# Altium PCB PCB1.PcbDoc
Units mil, origin at the board's own origin, x right, y up, seen from the top; angles counter-clockwise.
Board outline 1574.8 x 1574.8 mil, 4 copper layers (Top Layer, GND, POWER, Bottom Layer); 16 components, 19 nets, 108 pads, 316 vias.
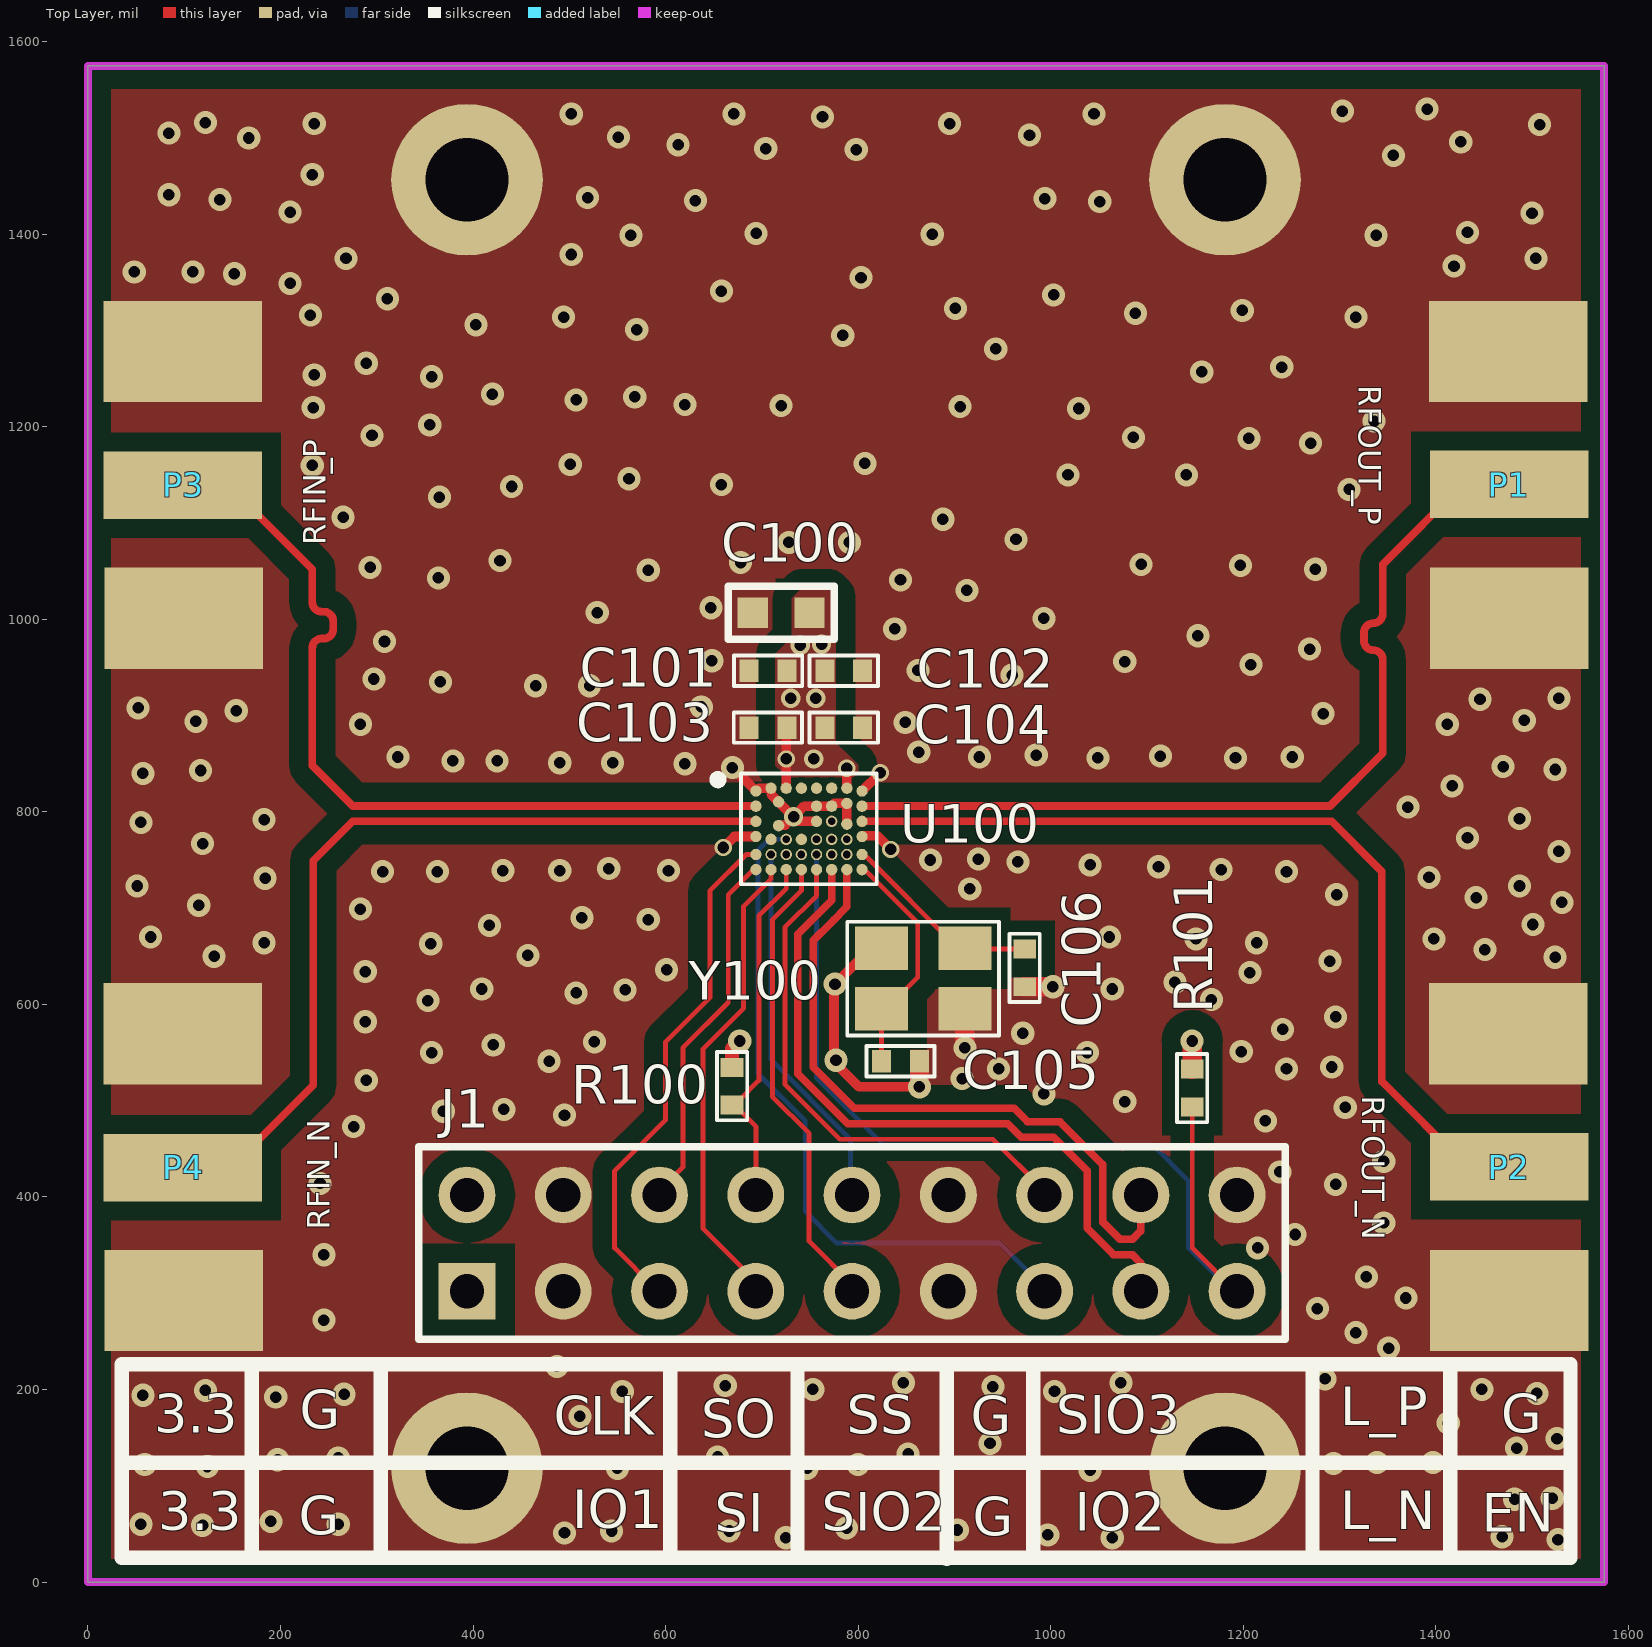
[diagram p0: Top Layer view]
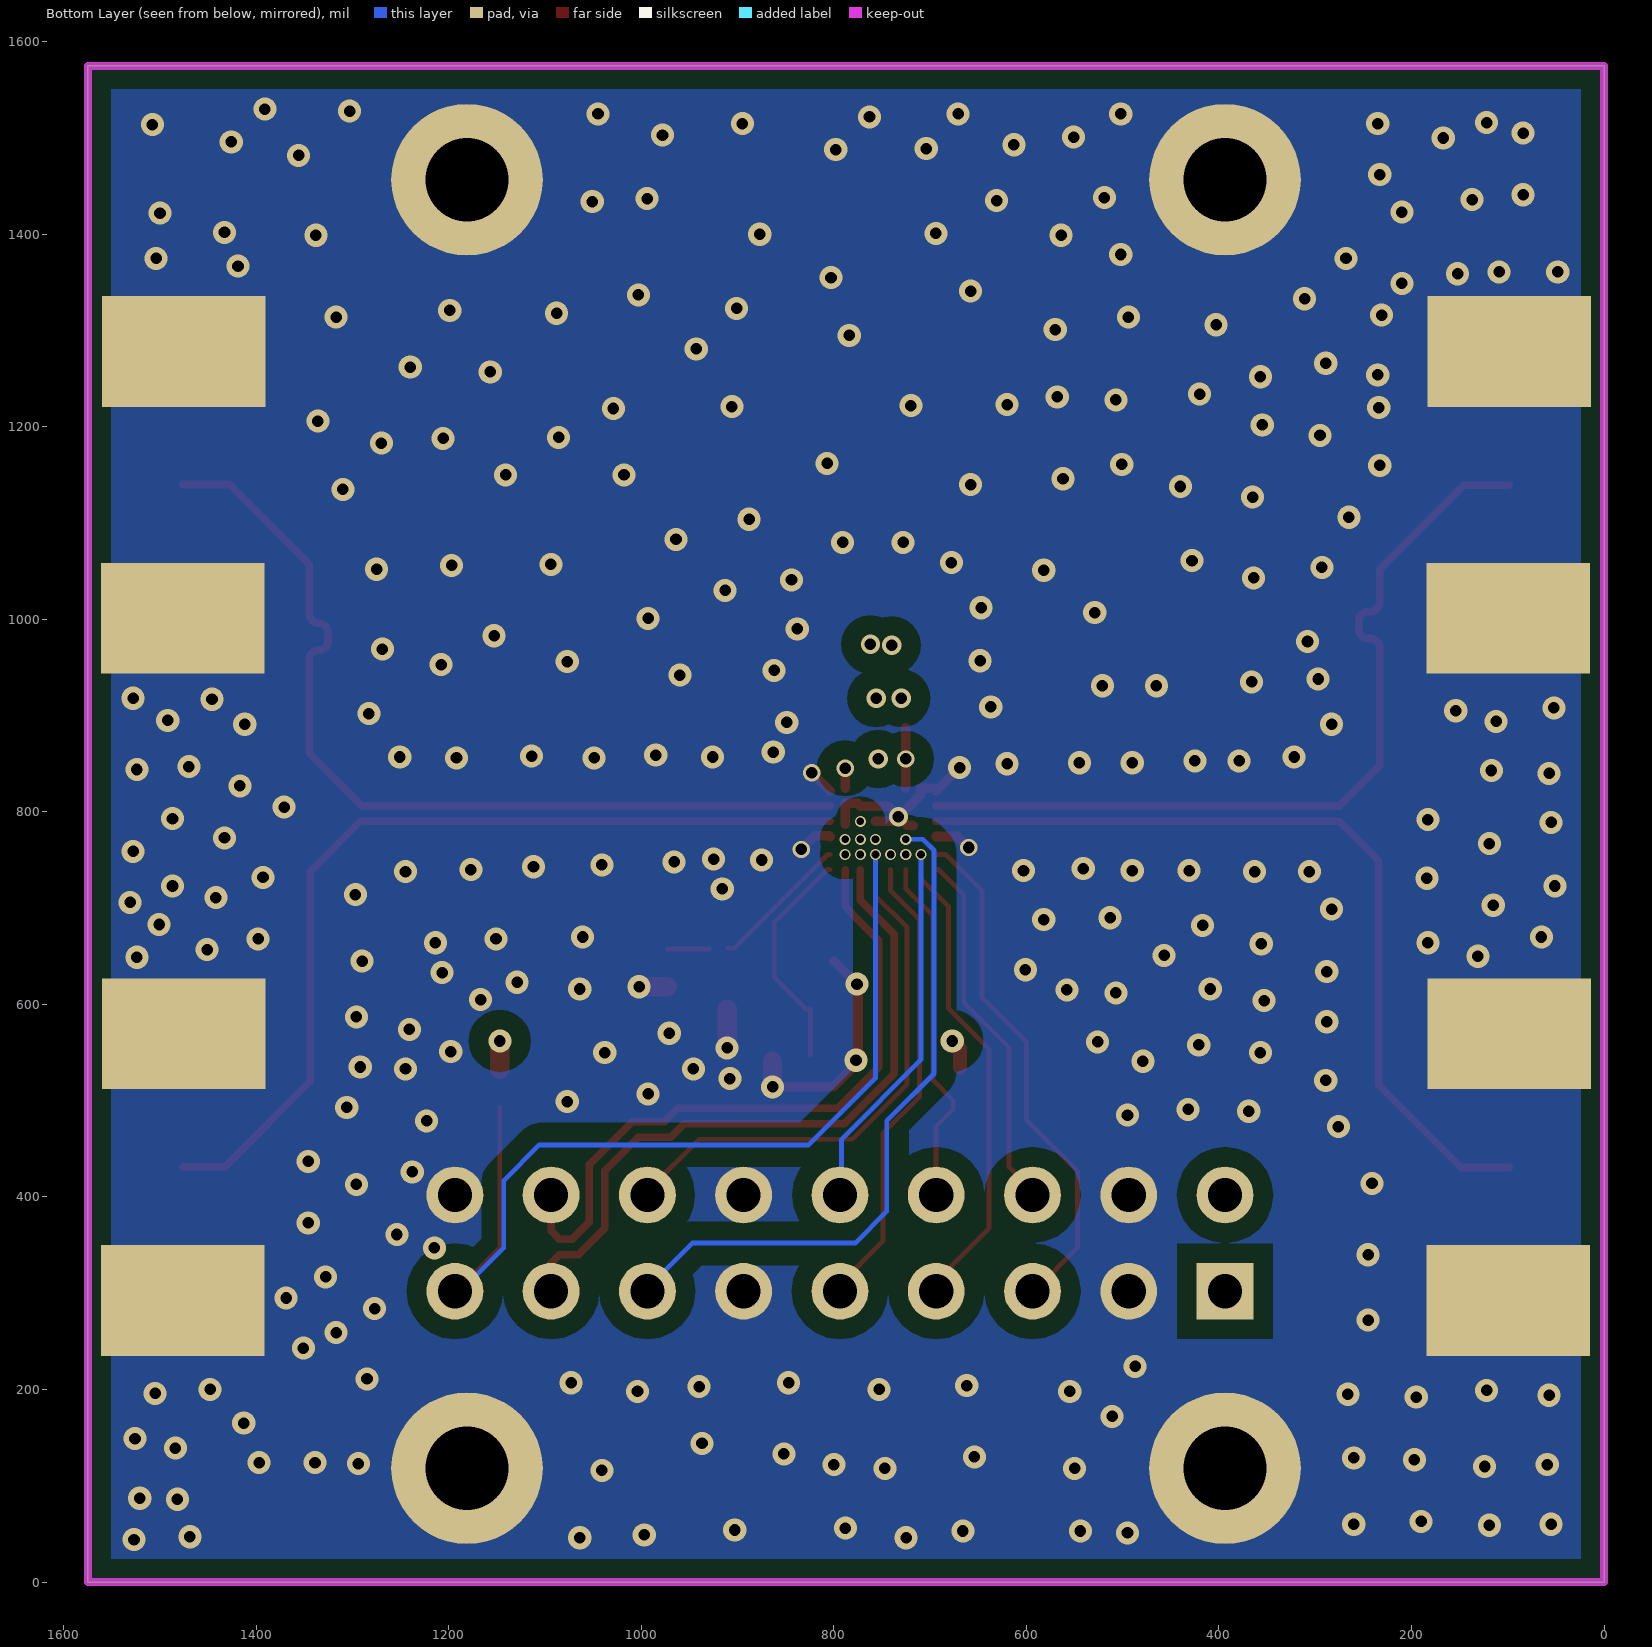
[diagram p1: Bottom Layer view, seen from below]
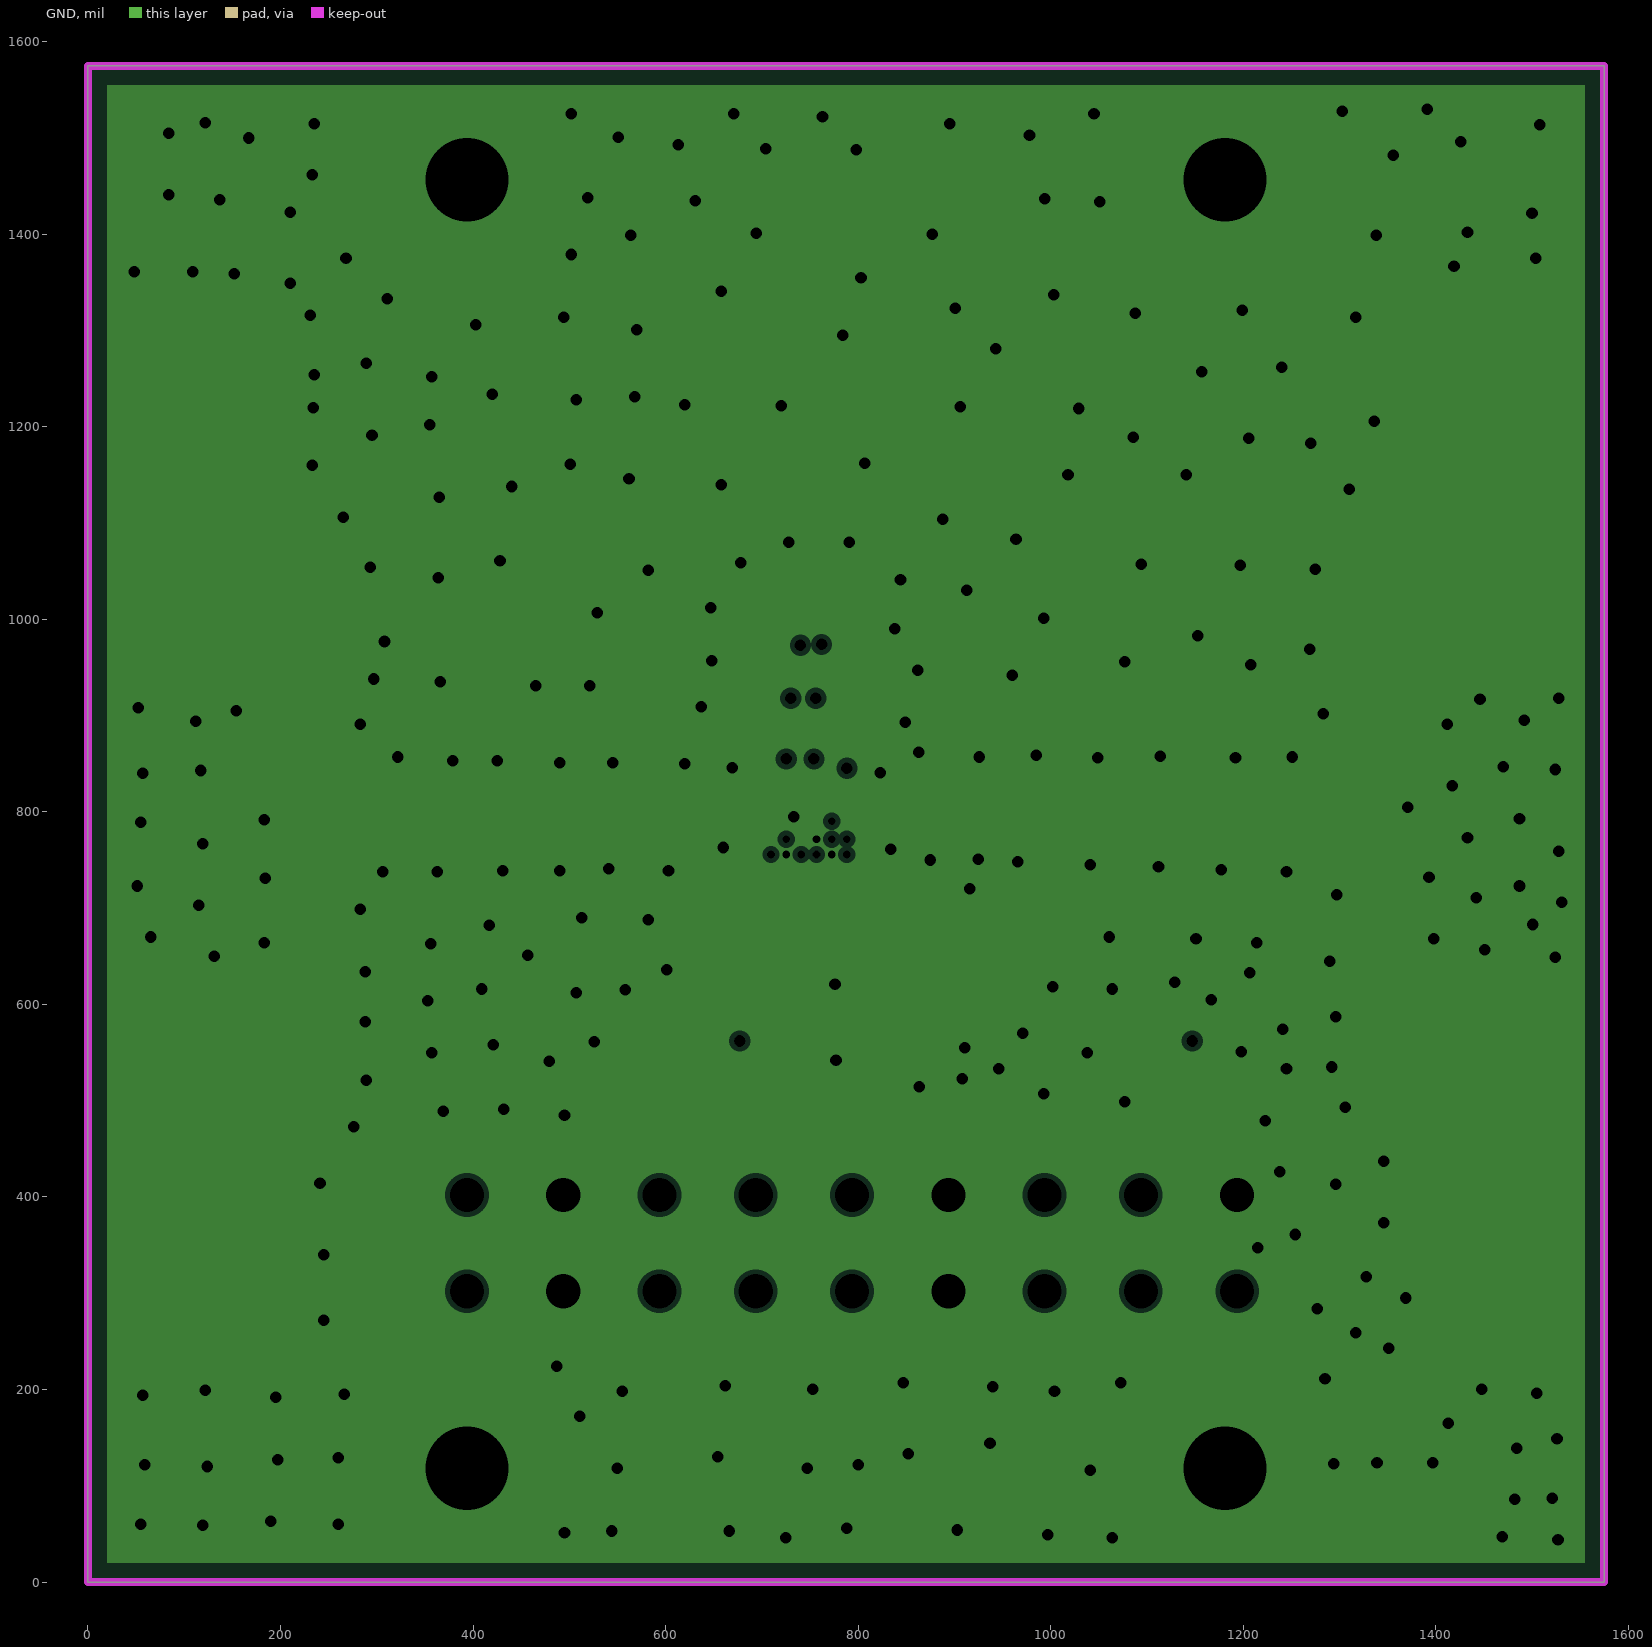
[diagram p2: GND, clearances drawn from the general rule]
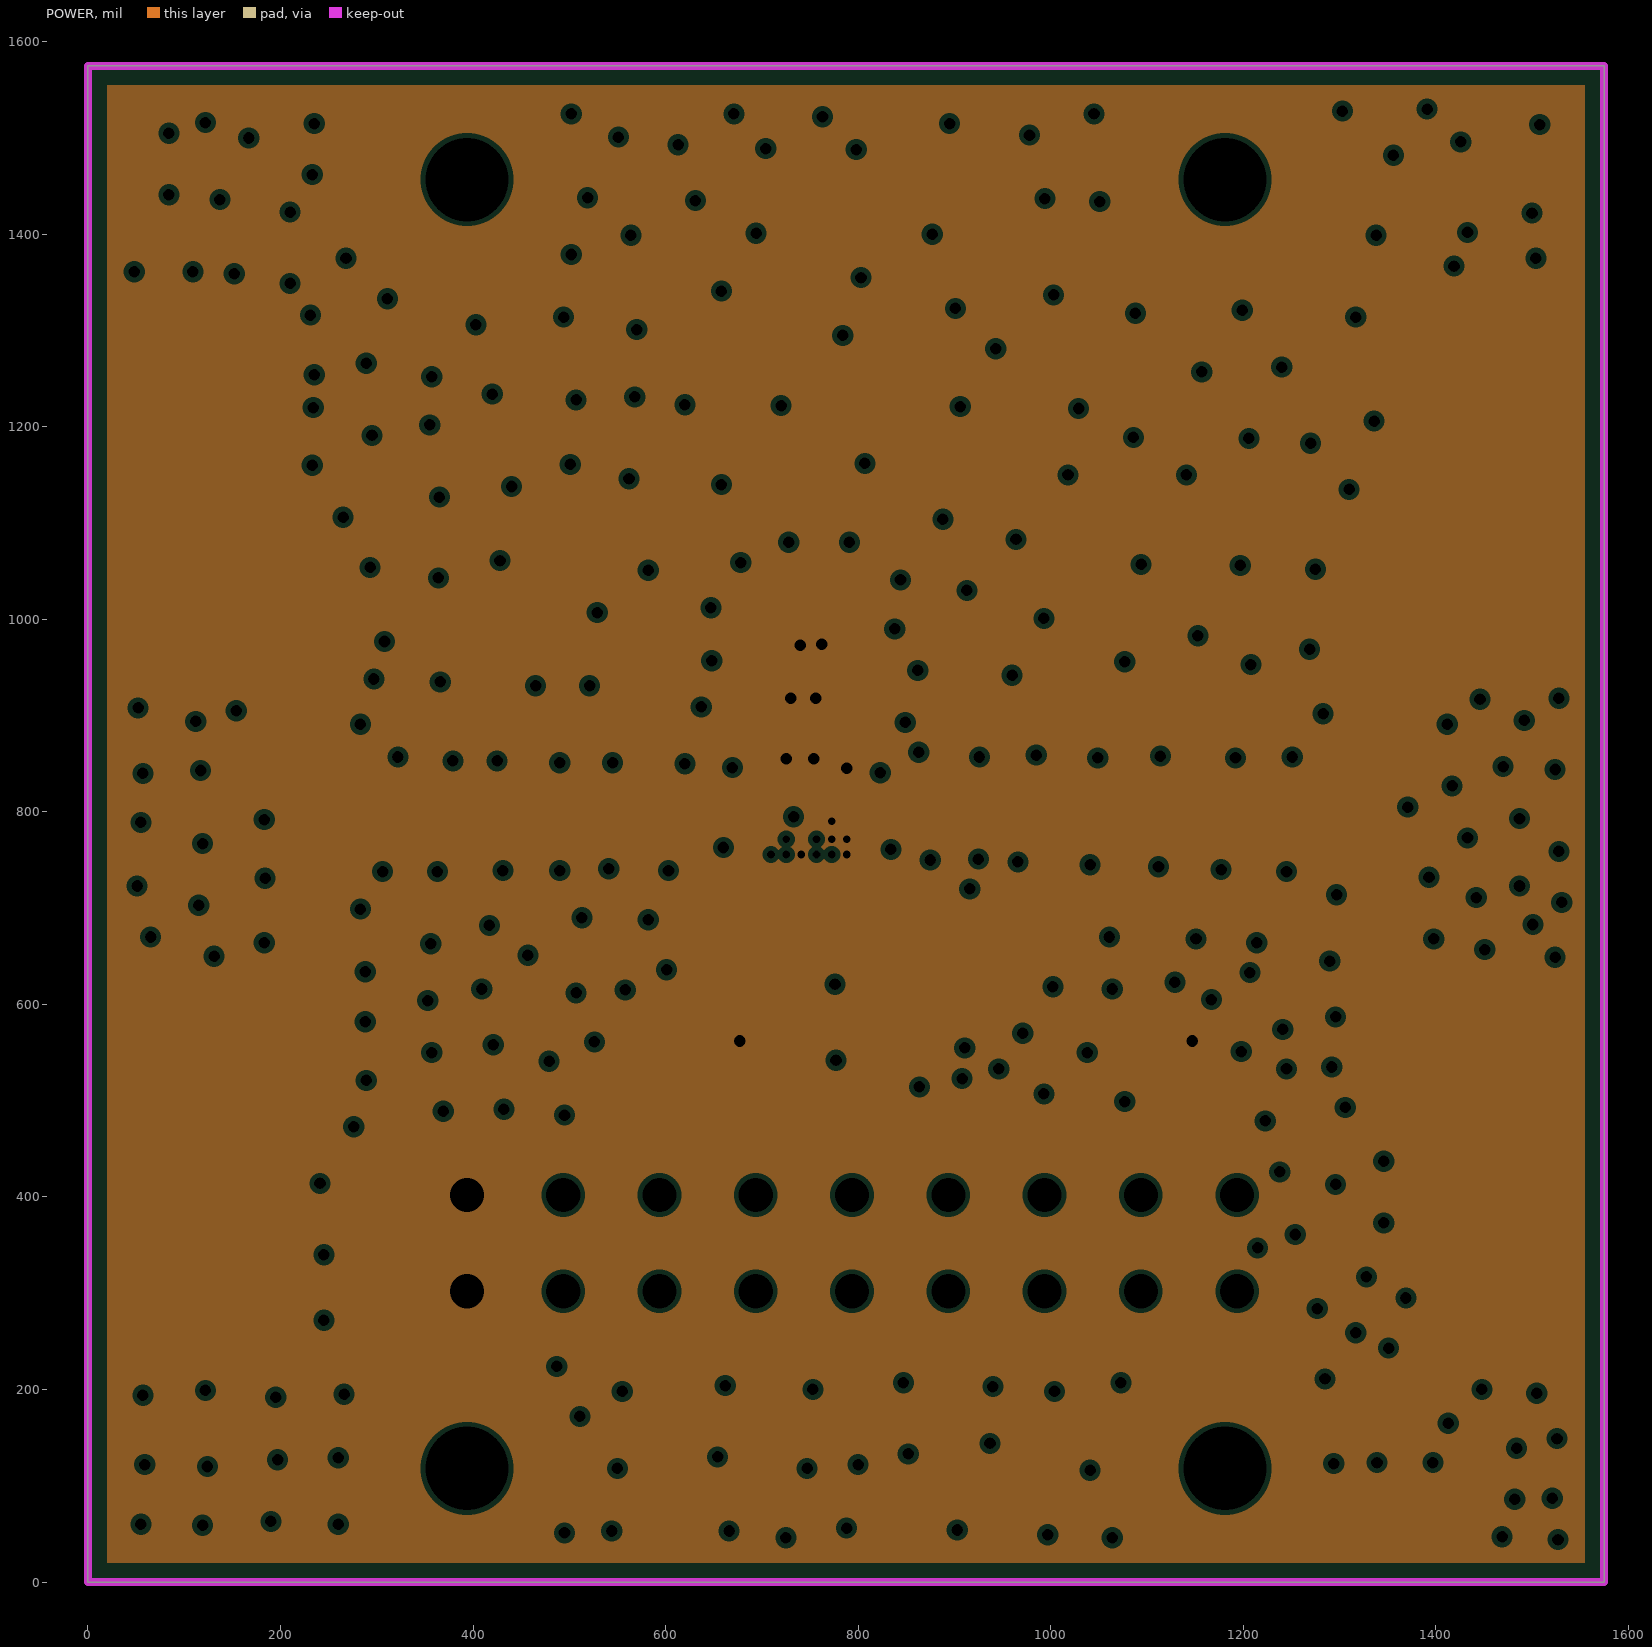
[diagram p3: POWER, clearances drawn from the general rule]
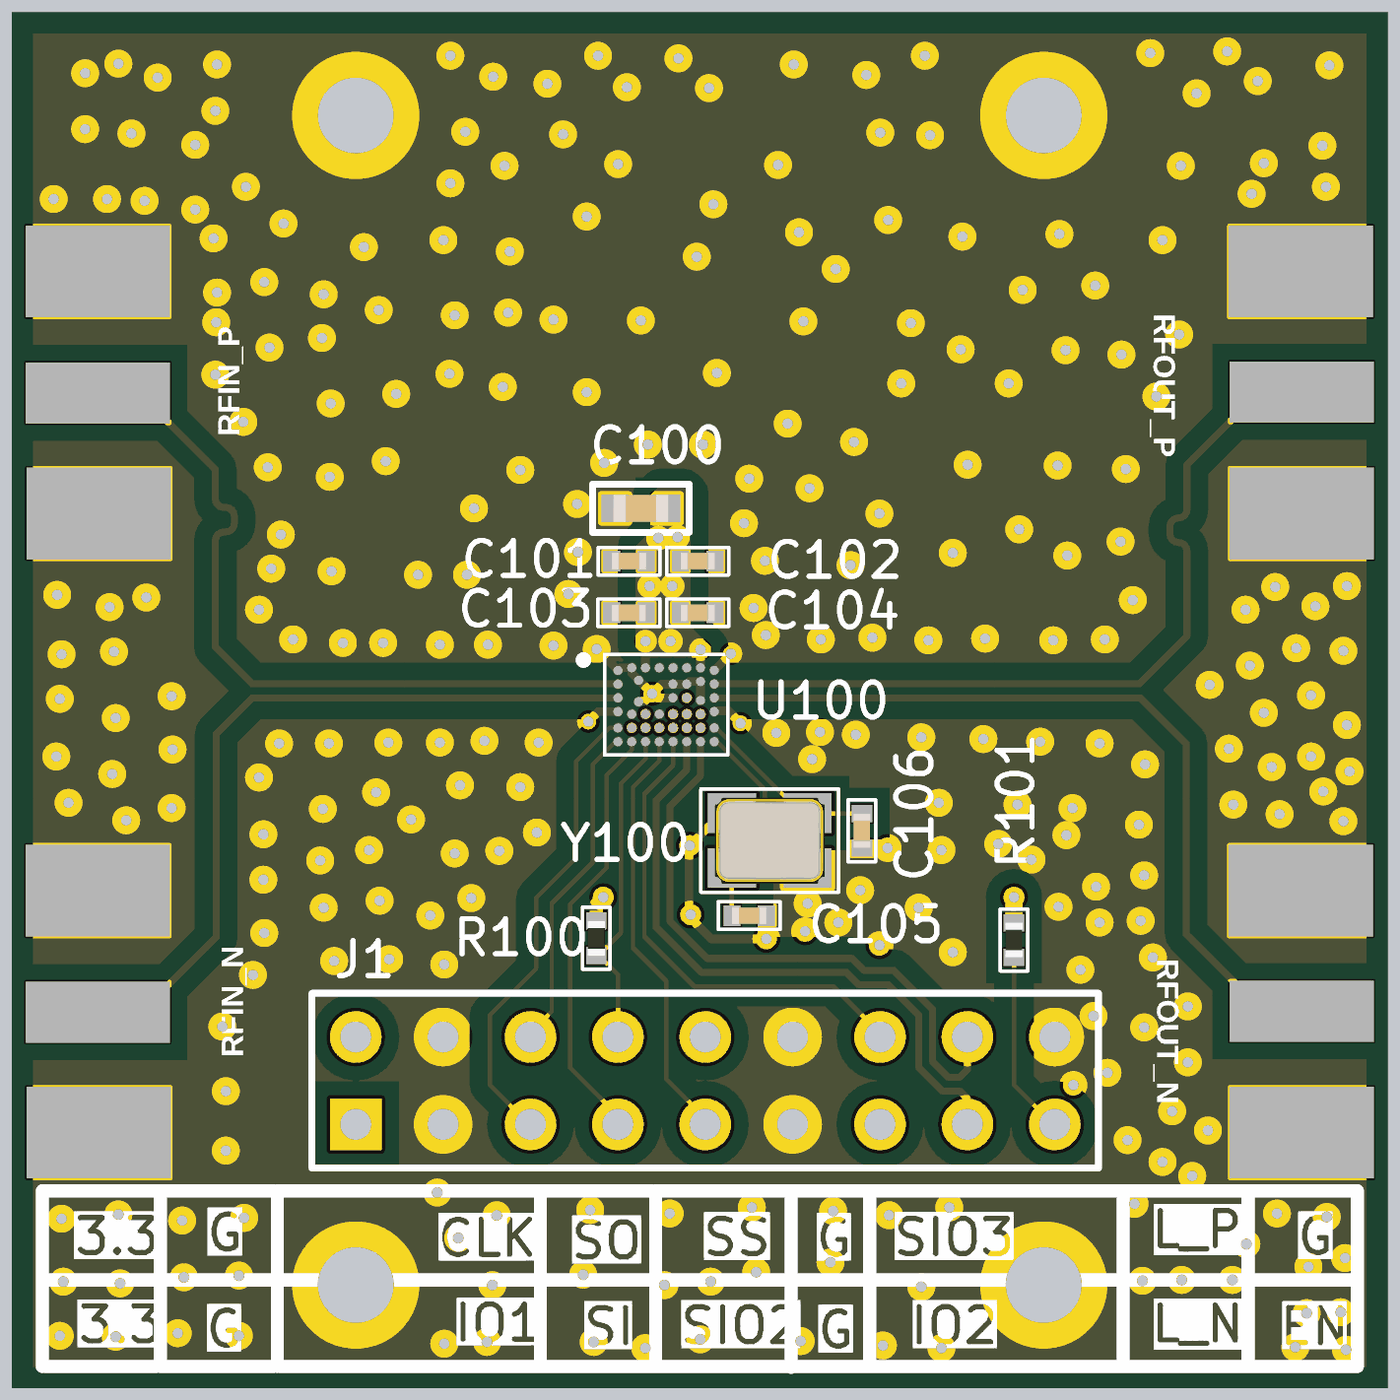
[diagram p4: 3D render of the assembled board from above, using the file's embedded part models]

## Layer stack, top to bottom
Top Layer: signal copper 1.4
Dielectric: core 12.6, FR-4, Dk 4.8
GND: plane copper 1.4, net GND
Dielectric: prepreg 12.6, FR-4, Dk 4.8
POWER: plane copper 1.4, net VDD3V
Dielectric: core 12.6, FR-4, Dk 4.8
Bottom Layer: signal copper 1.4

## Board outline
0,0 1574.8,0 1574.8,1574.8 0,1574.8

## Design rules (kind name [scope] priority, off if disabled: settings)
Clearance Clearance_2 [HASPAD('FREE-MARK')] p1: gap=50
Clearance Clearance_1 [INPOLYGON] p2: gap=6
Clearance [All] p3: gap=3.9
DiffPairsRouting DiffPair_100DiffPairsRouting [InDifferentialPairClass('New Class')] p1: maxlimit=8 minlimit=8 mostfreqgap=8 maxuncoupledlength=500
DiffPairsRouting [All] p2: maxlimit=5 minlimit=5 mostfreqgap=5 maxuncoupledlength=500
HoleToHoleClearance [All] p1: gap=0 allowstackedmicrovias=TRUE
MatchedLengths DiffPair_100MatchedLengths [InDifferentialPairClass('New Class')] p1: tolerance=1000 checknetsindiffpair=TRUE checkdiffpairvsdiffpair=TRUE checkothers=TRUE
MinimumSolderMaskSliver [All] p1: minsoldermaskwidth=0
PlaneClearance [All] p1: clearance=5
PlaneConnect [All] p1: planeconnectstyle=Direct reliefexpansion=20 reliefentries=4 reliefconductorwidth=10 reliefairgap=10
PolygonConnect [All] p1: connectstyle=Direct reliefconductorwidth=10 reliefentries=4 polygonreliefangle="90 Angle"
RoutingVias [All] p1: holewidth=6 width=50 viastyle="Through Hole" minholewidth=6 minwidth=11.5 maxholewidth=12 maxwidth=50
SilkToSilkClearance [All] p1: silktosilkclearance=0
SilkscreenOverComponentPads [All] p1: minsilkscreentomaskgap=0
SolderMaskExpansion [All] p1: expansion=4
Width DiffPair_100Width [InDifferentialPairClass('New Class')] p1: maxlimit=8 minlimit=8 preferedwidth=8 minimp=50.000000 maximp=50.000000 favimp=50.000000
Width [All] p2: maxlimit=30 minlimit=5 preferedwidth=5 minimp=50.000000 maximp=50.000000 favimp=50.000000
21 further rules are at their usual default settings.

## Classes and differential pairs
differential pair class "New Class": NewDifferentialPair1 NewDifferentialPair2 NewDifferentialPair3
differential pair NewDifferentialPair1: +IO5_LVDS_N -IO6_LVDS_P
differential pair NewDifferentialPair2: +RFIN_P -RFIN_N
differential pair NewDifferentialPair3: +RFOUT_P -RFOUT_N

## Components (designator, comment, footprint, x,y, rotation, side; value= is the part's Value field where it differs from the comment)
C100 "4u7" 0603-CAPACITOR-NONPOL 720,1007 r180 top
C101 "100n" 0402-CAPACITOR-NONPOL 706.42,946.57 r180 top
C102 "10n" 0402-CAPACITOR-NONPOL 785.06,946.57 r0 top
C103 "1n" 0402-CAPACITOR-NONPOL 706.32,887.51 r180 top
C104 "100p" 0402-CAPACITOR-NONPOL 785.06,887.51 r0 top
C105 "12p" 0402-CAPACITOR-NONPOL 844,541 r0 top
C106 "12p" 0402-CAPACITOR-NONPOL 973,638 r270 top
J1 "2.54mm双排针" HDR2X9_CEN 393.7,302 r0 top locked
P1 "SMA" SMD3 1476.38,1140.14 r0 top
P2 "SMA" SMD3 1476.38,431.48 r0 top
P3 "SMA" SMD3 98.43,1139.14 r180 top
P4 "SMA" SMD3 98.43,430.48 r180 top
R100 "10k" 0402-RESISTOR 669,515 r90 top
R101 "100k" 0402-RESISTOR 1147,513 r90 top
U100 "XeThru X4" 200106-002 748.83,782.27 r0 top
Y100 "27MHz" 200281 867.53,626.83 r0 top

## Footprints (in the part's own frame and the unit in brackets; to place one, negate y for a bottom-side part, rotate by r counter-clockwise, add the part's x,y. Pads: shape width x height; smd on the part's side, far side on the other; paste and mask are expansions set on the pad)
0402-CAPACITOR-NONPOL [mm]
  rect 0.5x0.6 smd mask+0.051: 1(-0.5,0) 2(0.5,0)
  silkscreen extent -0.9,-0.4 0.9,0.4, body extent -0.5,-0.25 0.5,0.25, height 0.49
0402-RESISTOR [mm]
  rect 0.5x0.6 smd mask+0.051: 1(-0.5,0) 2(0.5,0)
  silkscreen extent -0.9,-0.4 0.9,0.4, body extent -0.5,-0.25 0.5,0.25, height 0.3
0603-CAPACITOR-NONPOL [mm] "Minimal footprint for high density"
  rect 0.8x0.8 smd: 1(-0.75,0) 2(0.75,0)
  silkscreen extent -1.4,-0.7 1.4,0.7, body extent -0.8,-0.4 0.8,0.4, height 0.79
200106-002 [mm]
  round 0.3 smd paste-0.015 mask-0.05: A1(-1.398,1) A2(-0.998,1.074) A3(-0.597,1.074) A4(-0.198,1.074) A5(0.202,1.074) A6(0.603,1.074) A7(1.002,1.074) A8(1.402,1) B1(-1.398,0.6) B3(-0.798,0.714) B5(0.202,0.6) B6(0.603,0.6) B7(1.002,0.674) B8(1.402,0.6) C1(-1.398,0.2) C3(-0.798,0.086) C5(0.202,0.2) C6(0.603,0.2) C7(1.002,0.126) C8(1.402,0.2) D1(-1.398,-0.2) D2(-0.998,-0.274) D3(-0.597,-0.274) D4(-0.198,-0.274) D5(0.202,-0.274) D6(0.603,-0.274) D7(1.002,-0.274) D8(1.402,-0.2) E1(-1.398,-0.674) E2(-0.998,-0.674) E3(-0.597,-0.674) E4(-0.198,-0.674) E5(0.202,-0.674) E6(0.603,-0.674) E7(1.002,-0.674) E8(1.402,-0.674) F1(-1.398,-1.074) F2(-0.998,-1.074) F3(-0.598,-1.074) F4(-0.198,-1.074) F5(0.202,-1.074) F6(0.603,-1.074) F7(1.002,-1.074) F8(1.402,-1.074)
  silkscreen extent -2.5,-1.46 1.79,1.46, body extent -1.64,-1.31 1.64,1.31, height 0.58
200281 [mm]
  rect 1.4x1.15 smd: 1(-1.1,-0.8) 2(1.1,-0.8) 3(1.1,0.8) 4(-1.1,0.8)
  silkscreen extent -2,-1.5 2,1.5, body extent -1.6,-1.25 1.6,1.25, height 0.6
HDR2X9_CEN [mm] "Connector; Header; 9x2 Position"
  rect 1.5x1.5 hole 0.9: 1(0,0)
  round 1.5 hole 0.9: 2(2.54,0) 3(5.08,0) 4(7.62,0) 5(10.16,0) 6(12.7,0) 7(15.24,0) 8(17.78,0) 9(20.32,0) 10(0,2.54) 11(2.54,2.54) 12(5.08,2.54) 13(7.62,2.54) 14(10.16,2.54) 15(12.7,2.54) 16(15.24,2.54) 17(17.78,2.54) 18(20.32,2.54)
  silkscreen extent -1.27,-1.27 21.59,3.81
SMD3 [mil]
  rect 165x70 smd mask+2: 1(0,0)
  rect 165x105 smd mask+2: 2(0,-139) 3(-1,138)
  rect 170x115 smd far side mask+2: 4(0,-139) 5(-1,138)

## Part data
C100: library part 200128, "CAPACITOR, 4u7, 0603, 10%, 10V, X5R"
C101: library part 200010, "CAPACITOR, 100n, 0402, 10%, 10V, X5R"
C102: library part 200005, "CAPACITOR, 10n, 0402, 10%, 25V, X7R"
C103: library part 200205, "CAPACITOR, 1n, 0402, 10%, 25V, X7R"
C104: library part 200107, "CAPACITOR, 100p, 0402, 20%, 50V, X7R"
C105 C106: library part 200239, "CAPACITOR, 12p, 0402, 5%, 50V, NP0"
J1: library part "Header 9X2A", "Header, 9-Pin, Dual row"
P1 P2 P3 P4: library part "Header 5", "Header, 5-Pin"
R100: library part 200026, "RESISTOR, 10k, 0402, 1%, 63mW"
R101: library part 200027, "RESISTOR, 100k, 0402, 1%, 63mW"
U100: library part 200260-002
Y100: library part 200281, "LFXTAL072115, CRYSTAL 27MHZ, 10PF, SMD"

## Free pads (board coordinates)
  round 157.48 hole 86.61 mask-5.91: 1(393.7,118.11) 1(393.7,1456.69) 1(1181.1,118.11) 1(1181.1,1456.69)

## Via types
v1: diameter 24, hole 12, Top Layer to Bottom Layer, 294 vias
v2: diameter 11.5, hole 8, Top Layer to Bottom Layer, 11 vias
v3: diameter 20, hole 12, Top Layer to Bottom Layer, 6 vias
v4: diameter 18, hole 12, Top Layer to Bottom Layer, 5 vias

## Nets (pads, with @x,y where several pads share a name; then routed paths per layer and width w, separated by ;. In a path a pad name is that pad's centre, name@x,y a point inside that pad or via, vN(x,y) a via of type N, cw(c..) or ccw(c..) an arc to the next point about the centre after c; other vN are vias at no path point)
GND: C100.2 C101.2 C102.2 C103.2 C104.2 C105.2 C106.2 J1.2 J1.6 J1.11 J1.15 J1.18 P1.2 P1.3 P1.4 P1.5 P2.2 P2.3 P2.4 P2.5 P3.2 P3.3 P3.4 P3.5 P4.2 P4.3 P4.4 P4.5 pad.1 U100.A1 U100.A2 U100.A8 U100.B3 U100.B5 U100.B6 U100.B7 U100.C3 U100.C5 U100.C7 U100.D1 U100.D5 U100.D8 U100.E3 U100.E6 Y100.2 Y100.4 | length 624.8
  Top Layer w10: v4(660,763) 671.39,774.39 U100.D1 ; v1(669.45,846) U100.A1 696.72,824.55 U100.A2 709.56,818.25 U100.B3 729.81,798 729.81,791.81 724.29,786.29 718.54,786.29 718.54,785.65 U100.C3 ; v3(732.91,794.91) 737.67,790.14 U100.C5 ; v3@736,798 743.89,805.89 U100.B5 U100.B6 775.46,808.8 U100.B7 U100.C7 ; Y100.4@800,645 775,620 775,540 800.68,514.32 v1(863.68,514.32) ; U100.D8 804.99,775.34 819.66,775.34 v4(834,761) ; U100.A8 v4(823,840.59)
  Top Layer w20: v1(863.68,514.32) C105.2 ; v1(910.84,554.84) Y100.2 ; C106.2 v1(1002.32,618.32)
  other v1: 1527,44 725,46 1064,46 1469,47 997,49 495,51 544,53 666,53 903,54 788,56 119,59 55,60 260,60 190,63 1482,86 1521,87 1041,116 550,118 747,118 124,120 59,122 800,122 1294,123 1339,124 1397,124 197,127 260,129 654,130 852,133 1484,139 937,144 1526,149 1413,165 511,172 195,192 57,194 266,195 1505,196 555,198 1004,198 122,199 753,200 1448,200 940,203 662,204 847,207 1073,207 1285,211 487,224 1351,243 1317,259 245,272 1277,284 1369,295 1328,317 245,340 1215,347 1254,361 1346,373 1296,413 241,414 1238,426 1346,437 276,473 1223,479 495,485 369,489 432,491 1306,493 1077,499 993,507 289,521 908,523 946,533 1245,533 1292,535 479,541 777,542 357,550 1038,550 1198,551 421,558 526,561 971,570 1241,574 288,582 1296,587 353,604 1167,605 507,612 558,615 409,616 1064,616 776,621 1129,623 1207,633 288,634 601,636 1290,645 1524,649 131,650 457,651 1451,657 356,663 183,664 1214,664 1151,668 1398,668 65,670 1061,670 417,682 1501,683 582,688 513,690 283,699 115,703 1531,706 1442,711 1297,714 916,720 51,723 1487,723 184,731 1393,732 306,738 363,738 1245,738 431,739 490,739 603,739 1177,740 541,741 1112,743 1041,745 966,748 875,750 925,751 1528,759 119,767 1433,773 55,789 183,792 1487,793 1371,805 1417,827 57,840 117,843 1524,844 1470,847 620,850 490,851 545,851 379,853 425,853 1049,856 1192,856 322,857 926,857 1251,857 1114,858 985,859 863,862 283,891 1412,891 849,893 112,894 1492,895 1283,902 154,905 52,908 637,909 1446,917 1528,918 465,931 521,931 366,935 297,938 960,942 862,947 1208,953 1077,956 648,957 1269,969 308,977 1153,983 838,990 993,1001 529,1007 647,1012 913,1030 844,1041 364,1043 582,1051 1275,1052 293,1054 1197,1056 1094,1057 678,1059 428,1061 728,1080 791,1080 964,1083 888,1104 265,1106 365,1127 1310,1135 440,1138 658,1140 562,1146 1018,1150 1141,1150 233,1160 501,1161 807,1162 1270,1183 1206,1188 1086,1189 295,1191 355,1202 1336,1206 1029,1219 234,1220 906,1221 720,1222 620,1223 507,1228 568,1231 420,1234 357,1252 235,1254 1157,1257 1240,1262 289,1266 943,1281 784,1295 570,1301 403,1306 494,1314 1317,1314 231,1316 1088,1318 1199,1321 901,1323 311,1333 1003,1337 658,1341 210,1349 803,1355 152,1359 48,1361 109,1361 1419,1367 268,1375 1504,1375 502,1379 564,1399 1338,1399 877,1400 694,1401 1433,1402 1500,1422 210,1423 1051,1434 631,1435 137,1436 994,1437 519,1438 84,1441 233,1462 1356,1482 798,1488 704,1489 613,1493 1426,1496 167,1500 551,1501 978,1503 84,1505 1508,1514 235,1515 895,1515 122,1516 763,1522 502,1525 671,1525 1045,1525 1303,1528 1391,1530
  other v2: 725.31,755.73 772.55,755.73 756.8,771.48
IO5_LVDS_N: J1.8 U100.F6 | length 730
  Top Layer w8: 763.69,699.31 762.69,698.31 ; U100.F6 772.55,708.18 762.69,698.31 ; J1.8 1093.7,331.3 1085,340 1065.37,340 1038,367.37 1038,427 1003,462 969.37,462 955.37,476 789.37,476 737.4,527.97 737.4,673.03 762.69,698.31
IO6_LVDS_P: J1.17 U100.F7 | length 712.8
  Top Layer w8: 775,688 773,686 ; U100.F7 788.3,701.3 773,686 ; J1.17 1093.7,364.7 1085,356 1072,356 1054,374 1054,433.63 1009.63,478 976,478 962,492 796,492 753.4,534.6 753.4,666.4 773,686
QSPI_IO0/SPI_MOSI: J1.4 U100.F2 | length 480
  Top Layer w5: J1.4@694,312 639,367 639,554 681,596 681,702 709.56,730.56 U100.F2
QSPI_IO1/SPI_MISO: J1.13 R100.1 U100.F3 | length 350.3
  Top Layer w5: J1.13@694,419 694,473 676,491 676,500 697,521 697,692 725.31,720.31 U100.F3 ; J1.13@699,419 J1.13@700,420
QSPI_IO2: J1.5 U100.F4 | length 479.2
  Top Layer w5: U100.F4 741.06,718.06 711,688 711,504 749,466 749,354 J1.5@795,308
QSPI_IO3: J1.16 U100.F5 | length 548.3
  Top Layer w5: U100.F5 756.8,712.8 724,680 724,517 781,460 940,460 J1.16@991,409
QSPI_NSS/SPI_NSS: J1.14 U100.E2 | length 386.9
  Bottom Layer w5: v2(709.56,755.73) 709.56,542.44 792,460 J1.14@792,403
QSPI_SCLK/SPI_SCLK: J1.12 U100.F1 | length 370.3
  Top Layer w5: J1.12@598,411 618,431 618,555 665,602 665,714 690.98,739.98 U100.F1
RFIN_N: P4.1 U100.C1 | length 880.9
  Top Layer w8: P4.1 148.48,430.48 234,516 234,749.14 275,790.14 U100.C1
RFIN_P: P3.1 U100.B1 | length 879.6
  Top Layer w8: P3.1 145.86,1139.14 233,1052 233,1017.8 ccw(c242.8,1017.8) 242.8,1008 244.92,1008 cw(c244.92,998.2) 254.72,998.2 254.72,989.8 cw(c244.92,989.8) 244.92,980 242.8,980 ccw(c242.8,970.2) 233,970.2 233,848.14 275,806.14 693.81,806.14 U100.B1
RFOUT_N: P2.1 U100.C8 | length 948.6
  Top Layer w8: U100.C8 1291.87,790.14 1344,738.02 1344,520 1432.52,431.48 P2.1
RFOUT_P: P1.1 U100.B8 | length 948.1
  Top Layer w8: U100.B8 804.05,806.14 1290.14,806.14 1345,861 1345,958.2 ccw(c1335.2,958.2) 1335.2,968 cw(c1335.2,977.8) 1325.4,977.8 1325.4,986.2 cw(c1335.2,986.2) 1335.2,996 ccw(c1335.2,1005.8) 1345,1005.8 1345,1057 1428.14,1140.14 P1.1
VDD3V: C100.1 C101.1 C102.1 C103.1 C104.1 J1.1 J1.10 R100.2 R101.2 U100.A3 U100.A7 U100.C6 U100.D6 U100.D7 U100.E4 U100.E7 | length 143.9
  Top Layer w10: U100.A3 v4(725.31,855) 725.31,886.81 C103.1 ; U100.A7 v4(788.3,845.3)
  Top Layer w15: R100.2 669,554 v1(677,562)
  Top Layer w20: R101.2 v1(1147,562)
  other v2: 741.06,755.73 788.3,755.73 772.55,771.48 788.3,771.48 772.55,790.14
  other v3: 754,855 730,918 756,918 740,973 762,974
X4_ENABLE: J1.9 R101.1 U100.E5 | length 1007.7
  Top Layer w5: R101.1 1147,347 J1.9@1195,299
  Bottom Layer w5: v2(756.8,755.73) 756.8,523.2 826,454 1106,454 1143,417 1143,347 J1.9@1186,304
X4_IO1: J1.3 U100.E1 | length 536.3
  Top Layer w5: J1.3@590,304 547,347 547,427 600,480 600,561 646,607 646,718 683.73,755.73 U100.E1
X4_IO2: J1.7 U100.D3 | length 704.4
  Bottom Layer w5: v2(725.31,771.48) 707.48,771.48 696,760 696,528 745,479 745,385 778,352 947,352 J1.7@989,310
XIN27: C105.1 U100.F8 Y100.1 | length 237.1
  Top Layer w5: U100.F8 807.02,739.98 862,685 862,628 829.33,595.33 Y100.1 C105.1@824.22,547.22
XOUT27: C106.1 U100.E8 Y100.3 | length 190.5
  Top Layer w5: U100.E8 806.27,755.73 903.68,658.32 Y100.3 ; Y100.3@929.69,657.69 C106.1
pads on no net: U100.A4 U100.A5 U100.A6 U100.D2 U100.D4

## Polygon pours and split planes (outlines as drawn)
GND on Top Layer "Bottom Layer-No Net" (solid, remove dead copper, pour order 1001): -97.09,1495.53 -97.09,-91.47 -58.09,-130.47 37.91,-226.47 622.91,-226.47 1548.91,-226.47 1658.91,-116.47 1773.91,-1.47 1773.91,277.53 1773.91,1538.53 1677.91,1634.53 1629.91,1682.53 1447.91,1682.53 94.91,1682.53 -97.09,1490.53
VDD3V on Top Layer "Bottom Layer-No Net" (solid, remove dead copper, pour order 1000): 731,1008 731,981 726,976 714,964 714,948 714,848 720,842 726,836 786,836 795,836 799,840 800,841 800,846 800,849 793,856 777,872 777,945 777,1025 773,1029 770,1032 763,1032 741,1032 736,1027 731,1022 731,1008
GND on Bottom Layer "Bottom Layer-No Net" (solid, remove dead copper): -103,1556 -134,1525 -134,-121 1648,-121 1653,-116 1776,7 1776,1591 1711,1591 1543,1759 1526,1776 434,1776 116,1776 -99,1561
GND on GND (split plane): 1554.71,20.1 20.1,20.1 20.1,1554.71 1554.71,1554.71
VDD3V on POWER (split plane): 1554.71,20.1 20.1,20.1 20.1,1554.71 1554.71,1554.71

## Keep-outs
Keep-Out Layer:
  the board outline again, w7.87

## Silkscreen, mask and mechanical layers (free items; w line width, h text height)
Top Overlay:
  lines w15: 35,124 1535,124 ; 170,25 170,221 ; 304,25 304,226 ; 605,30 605,222 ; 737,30 737,226 ; 892,24 892,225 ; 982,30 982,223 ; 1272,26 1272,223 ; 1415,26 1415,225 ; 35,25 35,226 1540,226 1540,25 35,25
  text "RFOUT_P" at 1312,1243 h40 r270
  text "RFIN_P" at 255,1077 h40 r90
  text "RFOUT_N" at 1316,505 h40 r270
  text "RFIN_N" at 259,366 h40 r90
  text "L_P" at 1301,163 h40
  text "G" at 220,159 h40
  text "3.3" at 69,155 h40
  text "G" at 1468,155 h40
  text "SS" at 788,154 h40
  text "SIO3" at 1006,154 h40
  text "CLK" at 484,153 h40
  text "G" at 917,153 h40
  text "SO" at 637,150 h40
  text "IO1" at 503,56 h40
  text "L_N" at 1301,55 h40
  text "3.3" at 73,54 h40
  text "SIO2" at 762,53 h40
  text "IO2" at 1025,53 h40
  text "SI" at 651,52 h40
  text "EN" at 1448,52 h40
  text "G" at 219,49 h40
  text "G" at 919,48 h40